# Altium PCB TIDA-00643_PCB.PcbDoc (part 1 of 3)
Units mil, origin at the board's own origin, x right, y up, seen from the top; angles counter-clockwise.
Board outline 1000 x 2200 mil, 2 copper layers (Top Layer, Bottom Layer), stack 62 mil thick; 94 components, 77 nets, 320 pads, 233 vias.
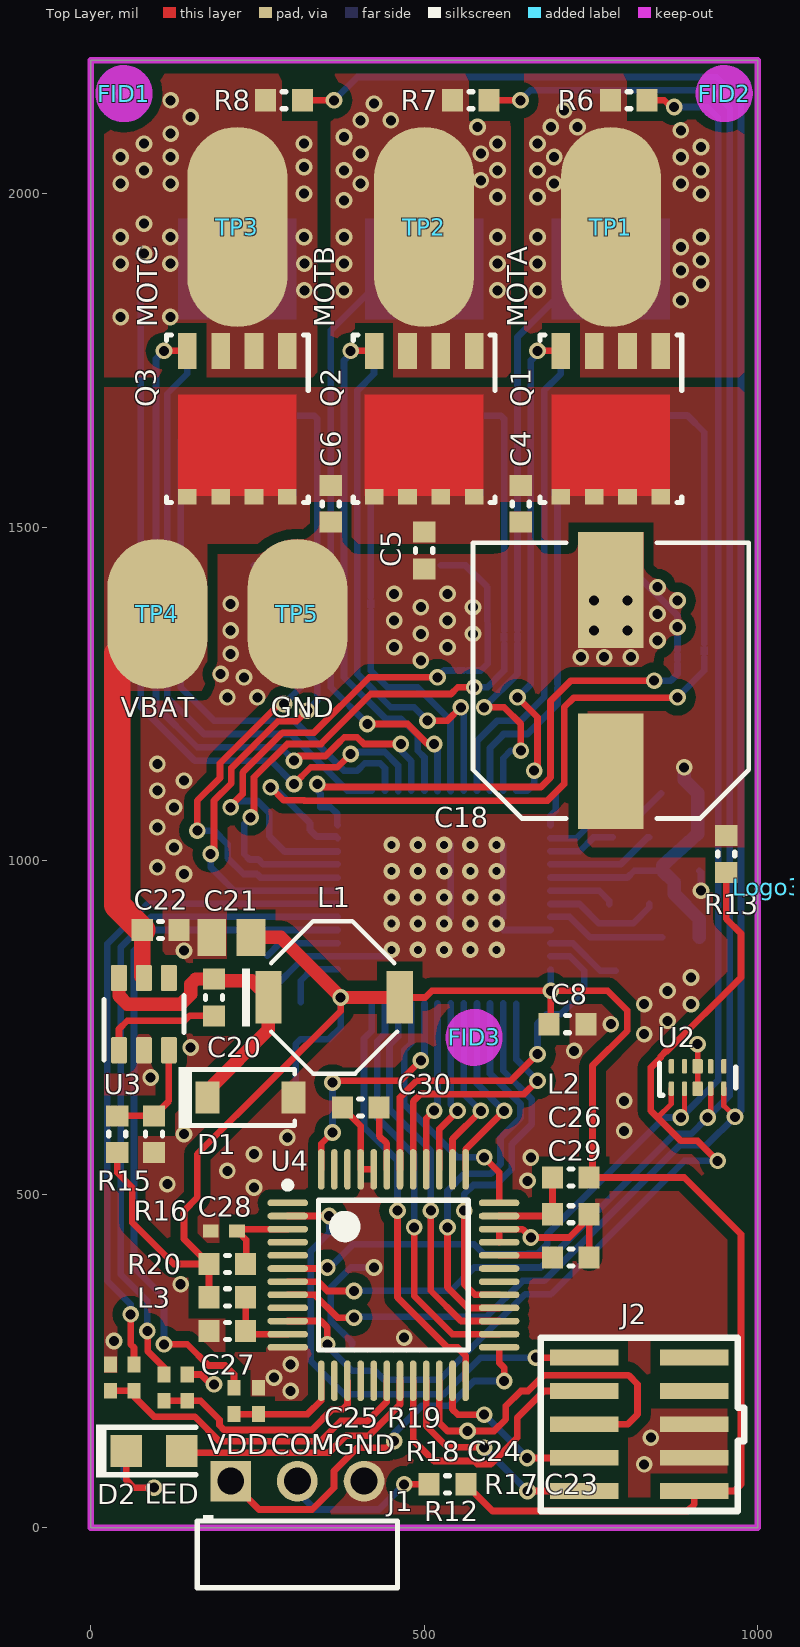
[diagram p0: Top Layer view]
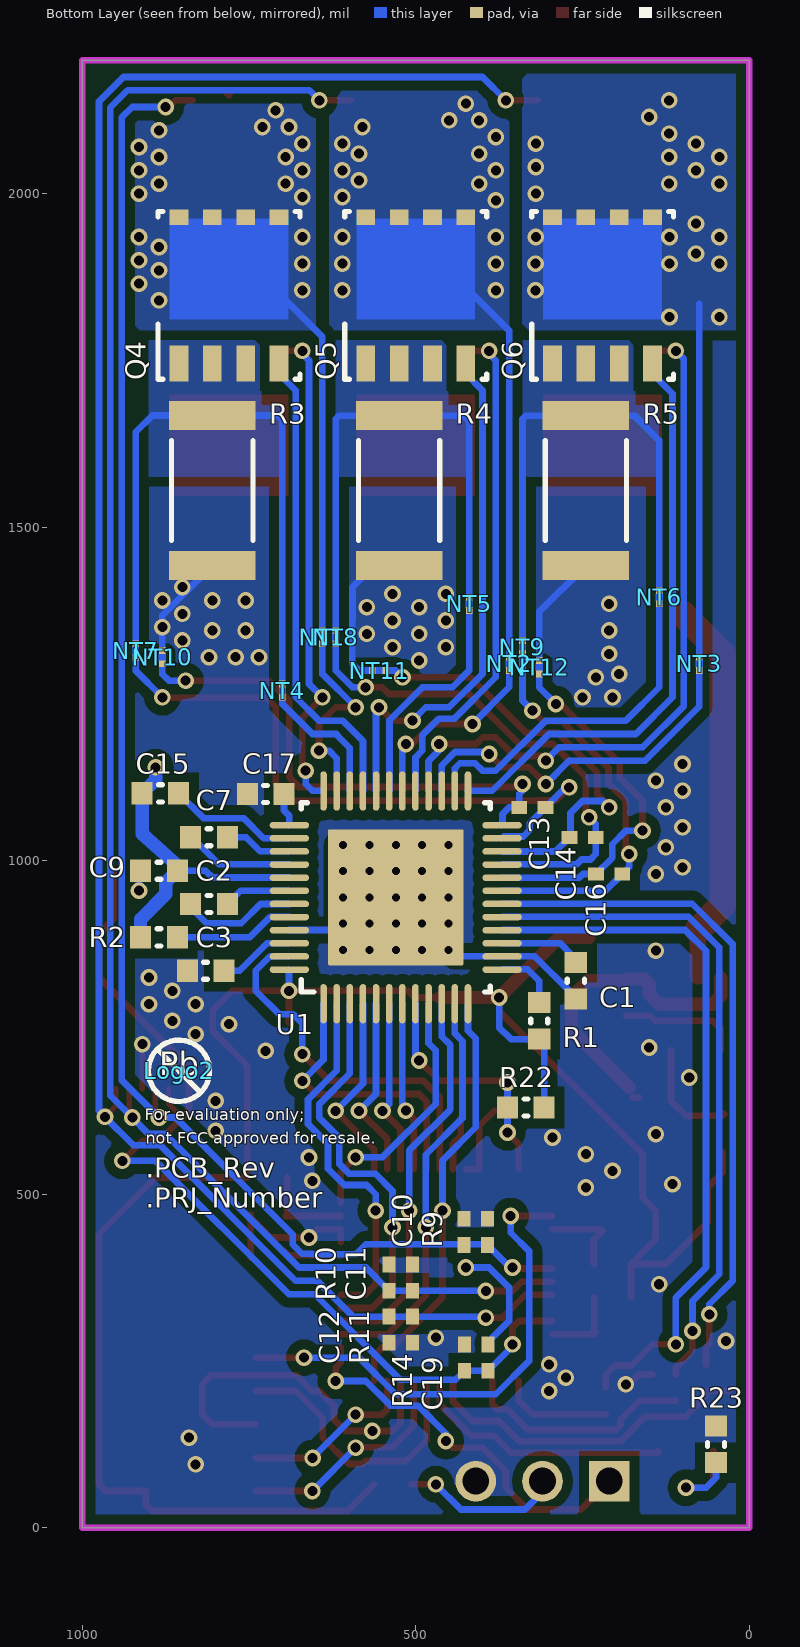
[diagram p1: Bottom Layer view, seen from below]

## Layer stack, top to bottom
Top Solder: solder mask 0.4, Solder Resist, Dk 3.5
Top Layer: signal copper 1.4
Dielectric1: core 59.2, FR-4, Dk 4.8
Bottom Layer: signal copper 1.4
Bottom Solder: solder mask 0.4, Solder Resist, Dk 3.5

## Board outline
0,0 0,2200 1000,2200 1000,0

## Design rules (kind name [scope] priority, off if disabled: settings)
AcuteAngle [All] p1: minimum=4.50000000000000E+0001 checktracksonly=FALSE
AssemblyTestPointUsage [All] p1: valid=2
Clearance Clearance_Keepouts [((IsTrack Or IsArc) And Not InPoly) And IsFree and IsKeepOut vs ((IsTrack Or IsArc) And Not InPoly) And IsFree and IsKeepOut] p1: gap=15 ignorepadtopadclearanceinfootprint=FALSE except(0: Arc-Hole Track-Hole SMDPad-Hole THPad-Hole Via-Hole Fill-Hole Poly-Hole Region-Hole Text-Hole)
Clearance Clearance_BoardEdge_MountingHoles [OnCopper and InComponentClass('Mounting Holes') vs IsKeepOut] p2: gap=40 ignorepadtopadclearanceinfootprint=FALSE except(0: Arc-Hole Track-Hole SMDPad-Hole THPad-Hole Via-Hole Fill-Hole Poly-Hole Region-Hole Text-Hole)
Clearance Clearance_BoardEdge_Poly [OnCopper and InPoly vs IsKeepOut] p3: gap=15 ignorepadtopadclearanceinfootprint=FALSE except(0: Arc-Hole Track-Hole SMDPad-Hole THPad-Hole Via-Hole Fill-Hole Poly-Hole Region-Hole Text-Hole)
Clearance Clearance_BoardEdge [OnCopper and Not InComponentClass('Logo') and not InComponentClass('FiducialMark') and not InRegion(1000,500,4000,800) and Not IsKeepout vs IsKeepOut] p4: gap=15 ignorepadtopadclearanceinfootprint=FALSE except(0: Arc-Hole Track-Hole SMDPad-Hole THPad-Hole Via-Hole Fill-Hole Poly-Hole Region-Hole Text-Hole)
Clearance Clearance_Poly [InPolygon] p5: gap=15 ignorepadtopadclearanceinfootprint=FALSE except(0: Arc-Hole Track-Hole SMDPad-Hole THPad-Hole Via-Hole Fill-Hole Poly-Hole Region-Hole Text-Hole)
Clearance [All] p6: gap=7 ignorepadtopadclearanceinfootprint=FALSE except(0: Arc-Hole Track-Hole SMDPad-Hole THPad-Hole Via-Hole Fill-Hole Poly-Hole Region-Hole Text-Hole)
ComponentClearance ComponentClearance_MountingHoles_FiducialMarks [InComponentClass('Mounting Holes') vs InComponentClass('FiducialMark')] p1: gap=50 collisioncheckmode=3 verticalgap=10 showdistances=FALSE
ComponentClearance ComponentClearance_Shunt [InComponentClass('Header') vs InComponentClass('Shunt')] p2: gap=0 collisioncheckmode=3 verticalgap=0 showdistances=FALSE
ComponentClearance ComponentClearance_Logo [InComponentClass('Logo')] p3: gap=50 collisioncheckmode=3 verticalgap=10 showdistances=FALSE
ComponentClearance ComponentClearance_ScrewToNut [(HasFootprint('NY PMS 440 0025 PH')) vs (HasFootprint('Keystone_1902C'))] p4: gap=5 collisioncheckmode=3 verticalgap=10 showdistances=FALSE
ComponentClearance ComponentClearance_MountingHoles [InComponentClass('Mounting Holes')] p5: gap=250 collisioncheckmode=3 verticalgap=100000 showdistances=FALSE
ComponentClearance ComponentClearance_SmallPassives [HasFootprint('0201*') or HasFootprint('0402*') or HasFootprint('0508') or HasFootprint('0603*') or HasFootprint('0612') or HasFootprint('0805*') or HasFootprint('0815*') or HasFootprint('0830*') or HasFootprint('1206*') or HasFootprint('1210*') or HasFootprint('1808*') or HasFootprint('1812*') or HasFootprint('1825*') or HasFootprint('2010*') or HasFootprint('2220*') or HasFootprint('2225*') or HasFootprint('2512*') or HasFootprint('2728*') or HasFootprint('3518*') vs HasFootprint('0201*') or HasFootprint('0402*') or HasFootprint('0508') or HasFootprint('0603*') or HasFootprint('0612') or HasFootprint('0805*') or HasFootprint('0815*') or HasFootprint('0830*') or HasFootprint('1206*') or HasFootprint('1210*') or HasFootprint('1808*') or HasFootprint('1812*') or HasFootprint('1825*') or HasFootprint('2010*') or HasFootprint('2220*') or HasFootprint('2225*') or HasFootprint('2512*') or HasFootprint('2728*') or HasFootprint('3518*')] p6: gap=10 collisioncheckmode=3 verticalgap=10 showdistances=FALSE
ComponentClearance ComponentClearance_THtoSMT [IsThruComponent vs IsSMTComponent] p7: gap=10 collisioncheckmode=3 verticalgap=30 showdistances=FALSE
ComponentClearance ComponentClearance_THtoTH [IsThruComponent vs IsThruComponent] p8: gap=20 collisioncheckmode=3 verticalgap=30 showdistances=FALSE
ComponentClearance [All] p9: gap=9.99 collisioncheckmode=3 verticalgap=10 showdistances=FALSE
DiffPairsRouting [All] p1: maxlimit=100 minlimit=10 mostfreqgap=10 toplayer_minwidth=15 toplayer_maxwidth=15 toplayer_prefwidth=15 bottomlayer_minwidth=15 bottomlayer_maxwidth=15 bottomlayer_prefwidth=15 maxuncoupledlength=1000
FabricationTestPointUsage TestPointUsage [All] p1: valid=2 allowmultiple=FALSE
FabricationTestpoint Testpoint [All] p1: side=3 testpointundercomponent=TRUE minsize=40 maxsize=100 preferedsize=60 minholesize=0 maxholesize=40 preferedholesize=32 testpointgrid=1 allowsidetop=TRUE allowsidebottom=TRUE usegrid=TRUE gridtolerance=0.01
FanoutControl Fanout_LCC [IsLCC] p1: bgadir=Out bgaviamode=Centered fanoutstyle=Auto fanoutdirection=Alternating viagrid=1 // Fanout_LCC (Default Rule)
FanoutControl Fanout_BGA [IsBGA] p2: bgadir=Out bgaviamode=Centered fanoutstyle=Auto fanoutdirection=Alternating viagrid=1 // Fanout_BGA (Default Rule)
FanoutControl Fanout_Default [All] p4: bgadir=Out bgaviamode=Centered fanoutstyle=Auto fanoutdirection=Alternating viagrid=1 // Fanout_Default (Default Rule)
FanoutControl Fanout_Small [(CompPinCount < 5)] p5: bgadir=Out bgaviamode=Centered fanoutstyle=Auto fanoutdirection=OutThenIn viagrid=1 // Fanout_Small (Default Rule)
HoleSize [All] p1: absolutevalues=TRUE maxlimit=251 minlimit=8 maxpercent=80.000 minpercent=20.000
MinimumAnnularRing MinimumAnnularRing_ThermalPadVias [IsVia and InAnyComponent] p1: minimumring=5.91
MinimumAnnularRing [All] p2: minimumring=5
MinimumSolderMaskSliver MinimumSolderMaskSliver_Logo [InComponentClass('Logo') vs InComponentClass('Logo')] p1: minsoldermaskwidth=0.7
MinimumSolderMaskSliver [All] p2: minsoldermaskwidth=3.94
PlaneClearance [All] p1: clearance=15
PlaneConnect [All] p1: planeconnectstyle=Relief reliefexpansion=10 reliefentries=4 reliefconductorwidth=10 reliefairgap=10
PolygonConnect [All] p1: connectstyle=Direct reliefconductorwidth=10 reliefentries=4 polygonreliefangle="90 Angle" airgapwidth=10
RoutingVias ThermalPadVias [IsVia and InAnyComponent] p1: holewidth=7.87 width=19.68 viastyle="Through Hole" minholewidth=7.87 minwidth=19.68 maxholewidth=12.99 maxwidth=26
RoutingVias [All] p2: holewidth=16 width=34 viastyle="Through Hole" minholewidth=7.87 minwidth=25 maxholewidth=40 maxwidth=65
ShortCircuit [All] p1: allowed=TRUE
SilkToBoardRegionClearance [Not ((IsComment or IsDesignator) And (Hide <> 'False')) and not InRegion(1000,500,4000,800)] p1:
SilkToSilkClearance SilkToSilkClearance_Pb-FreeLogo [(HasFootprint('Pb-Free_Overlay_Medium') OR HasFootprint('Pb-Free_Overlay_Small')) vs (HasFootprint('Pb-Free_Overlay_Medium') OR HasFootprint('Pb-Free_Overlay_Small'))] p1: silktosilkclearance=0
SilkToSilkClearance [All] p2: silktosilkclearance=4
SilkToSolderMaskClearance "Silk to Solder Mask Opening" [All] p1: minsilkscreentomaskgap=2 clearancetoexposedcopper=FALSE
SolderMaskExpansion [All] p1: expansion=1.97
Width [All] p1: maxlimit=100 minlimit=6 preferedwidth=10 checkconnectedcopper=TRUE
13 further rules are at their usual default settings.

## Classes and differential pairs
component class TIDA-00643_8305: C1 C2 C3 C4 C5 C6 C7 C8 C9 C10 C11 C12 C13 C14 C15 C16 C17 FID1 FID2 FID3 Logo2 Logo3 NT1 NT2 NT3 NT4 NT5 NT6 NT7 NT8 NT9 NT10 NT11 NT12 Q1 Q2 Q3 Q4 Q5 Q6 R1 R2 R3 R4 R5 R6 R7 R8 R9 R10 R11 TP1 TP2 TP3 U1 ZZ1 ZZ2 ZZ3
component class TIDA-00643_C2000: C18 C19 C20 C21 C22 C23 C24 C25 C26 C27 C28 C29 C30 D1 D2 J1 J2 L1 L2 L3 R12 R13 R14 R15 R16 R17 R18 R19 R20 R22 R23 TP4 TP5 U2 U3 U4

## Components (designator, comment, footprint, x,y, rotation, side; value= is the part's Value field where it differs from the comment)
C1 "GMK107BJ105KA-T" 0603L 260,820 r90 bottom value=1uF
C2 "GRM188R71E473KA01D" 0603L 810,935 r0 bottom value=0.047uF
C3 "GMK107BJ105KA-T" 0603L 815,835 r180 bottom value=1uF
C4 "GMK107BJ105KA-T" 0603L 645,1535 r270 top value=1uF
C5 "GMK107BJ105KA-T" 0603L 500,1465 r270 top value=1uF
C6 "GMK107BJ105KA-T" 0603L 360,1535 r270 top value=1uF
C7 "GRM188R71E473KA01D" 0603L 810,1035 r180 bottom value=0.047uF
C8 "GRM188R61C105KA93D" 0603L 715,755 r0 top value=1uF
C9 "GRM188R6YA475KE15D" 0603_100L 885,985 r0 bottom value=4.7uF
C10 "885012105016" 0402L 427.59,443.47 r90 bottom value=0.1uF
C11 "885012105016" 0402L 505,375 r90 bottom value=0.1uF
C12 "885012105016" 0402L 540,296.81 r270 bottom value=0.1uF
C13 "GRM1555C1H102JA01D" 0402L 325,1080 r0 bottom value=1000pF
C14 "GRM1555C1H102JA01D" 0402L 250,1035 r0 bottom value=1000pF
C15 "GRM188R6YA225KA12D" 0603L 882.95,1100.89 r180 bottom value=2.2uF
C16 "GRM1555C1H102JA01D" 0402L 210,980 r0 bottom value=1000pF
C17 "GMK107BJ105KA-T" 0603L 725,1100 r180 bottom value=1uF
C18 "EEE-FPV391UAP" CAPAE1030X1080 780,1270 r90 top value=390uF
C19 "885012105016" 0402L 391.79,255 r90 bottom value=0.1uF
C20 "C0603C334Z3VACTU" 0603L 185,795 r270 top value=0.33uF
C21 "C2012X5R1C226K125AC" 0805L 211.17,885 r180 top value=22uF
C22 "GMK107BJ105KA-T" 0603L 105,896.1 r0 top value=1uF
C23 "GRM155R71C222KA01D" 0402L 251.81,190 r90 top value=2200pF
C24 "GRM155R71C222KA01D" 0402L 145,210 r90 top value=2200pF
C25 "GRM155R71C222KA01D" 0402L 30,225 r90 top value=2200pF
C26 "GRM188R61C225KE15D" 0603L 720,470 r0 top value=2.2uF
C27 "GRM188R61C225KE15D" 0603L 205,295 r180 top value=2.2uF
C28 "885012105016" 0402L 200,445 r180 top value=0.1uF
C29 "GRM188R61C225KE15D" 0603L 720,405 r0 top value=2.2uF
C30 "GRM188R61C225KE15D" 0603L 405,630 r180 top value=2.2uF
D1 "MBR1H100SFT3G" SOD-123FL 240,645 r0 top value=100V
D2 "LTST-C171GKT" LED_LTST-C171 95,115 r180 top value=Green
FID1 "Fiducial" Fiducial6.4-20 50,2150 r0 top
FID2 "Fiducial" Fiducial6.4-20 950,2150 r0 top
FID3 "Fiducial" Fiducial6.4-20 575,735 r0 top
J1 "PBC03SGBN" Sullins_xxC03SGBN 310,-40 r0 top
J2 "Header 5X2" "IDC DC3-10P 2X5P" 820,155 r180 top
L1 "SD53-150-R" SD53 365,795 r0 top value=15uH
L2 "BLM18KG601SN1D" 0603L 720,525 r0 top value="600 ohm"
L3 "BLM18KG601SN1D" 0603L 205,345.31 r180 top value="600 ohm"
Logo2 "Pb-Free Symbol" Pb-Free_Overlay_Small 855,685 r180 bottom
Logo3 "FCC disclaimer" FCC_disclaimer_stacked 1015,960 r90 top
NT1 "Net-Tie" Net-Tie_10mil#1 640,1335 r90 bottom net-tie
NT2 "Net-Tie" Net-Tie_10mil#1 360,1295 r90 bottom net-tie
NT3 "Net-Tie" Net-Tie_10mil#1 75,1295 r90 bottom net-tie
NT4 "Net-Tie" Net-Tie_10mil#2 700,1255 r270 bottom net-tie
NT5 "Net-Tie" Net-Tie_10mil#2 420,1385 r270 bottom net-tie
NT6 "Net-Tie" Net-Tie_10mil#2 135,1395 r270 bottom net-tie
NT7 "Net-Tie" Net-Tie_10mil#2 920,1315 r270 bottom net-tie
NT8 "Net-Tie" Net-Tie_10mil#2 620,1335 r270 bottom net-tie
NT9 "Net-Tie" Net-Tie_10mil#2 340,1320 r270 bottom net-tie
NT10 "Net-Tie" Net-Tie_10mil#2 880,1305 r270 bottom net-tie
NT11 "Net-Tie" Net-Tie_10mil#2 555,1285 r180 bottom net-tie
NT12 "Net-Tie" Net-Tie_10mil#2 315,1290 r270 bottom net-tie
Q1 "CSD17573Q5B" TRANS_NexFET_Q5B 780,1655 r270 top value=30V
Q2 "CSD17573Q5B" TRANS_NexFET_Q5B 500,1655 r270 top value=30V
Q3 "CSD17573Q5B" TRANS_NexFET_Q5B 220,1655 r270 top value=30V
Q4 "CSD17573Q5B" TRANS_NexFET_Q5B 780,1855 r90 bottom value=30V
Q5 "CSD17573Q5B" TRANS_NexFET_Q5B 500,1855 r90 bottom value=30V
Q6 "CSD17573Q5B" TRANS_NexFET_Q5B 220,1855 r90 bottom value=30V
R1 "RC0603FR-0710KL" 0603L 315,760 r270 bottom value=10.0k
R2 "RC0603FR-07100RL" 0603L 885,885 r0 bottom value=100
R3 "PMR100HZPFU7L00" 2512L 805,1555 r90 bottom value=0.007
R4 "PMR100HZPFU7L00" 2512L 525,1555 r90 bottom value=0.007
R5 "PMR100HZPFU7L00" 2512L 245,1555 r90 bottom value=0.007
R6 "CRCW060324K9FKEA" 0603L 806.81,2140 r180 top value=24.9k
R7 "CRCW060324K9FKEA" 0603L 570,2140 r180 top value=24.9k
R8 "CRCW060324K9FKEA" 0603L 290,2140 r180 top value=24.9k
R9 "CRCW04024K99FKED" 0402L 392.59,443.47 r270 bottom value=4.99k
R10 "CRCW04024K99FKED" 0402L 540,375 r270 bottom value=4.99k
R11 "CRCW04024K99FKED" 0402L 505,296.81 r90 bottom value=4.99k
R12 "CRCW06030000Z0EA" 0603L 535,65 r0 top value=0
R13 "RC0603FR-0724K9L" 0603L 953,1010 r90 top value=24.9k
R14 "CRCW04024K99FKED" 0402L 426.79,255 r270 bottom value=4.99k
R15 "RC0603FR-0768KL" 0603L 40,590 r270 top value=68.0k
R16 "CRCW060320K0FKEA" 0603L 95,590 r90 top value=20.0k
R17 "CRCW040256R0JNED" 0402L 215,190 r90 top value=56
R18 "CRCW040256R0JNED" 0402L 110,210 r90 top value=56
R19 "CRCW040256R0JNED" 0402L 65,225 r90 top value=56
R20 "CRCW060347K0JNEA" 0603L 205,395.31 r180 top value=47k
R22 "RC0603FR-0710KL" 0603L 335,630 r180 bottom value=10.0k
R23 "CRCW0603330RJNEA" 0603L 50,125 r270 bottom value=330
TP1 "TESTPOINT" TESTPOINT#1 760,1975 r90 top
TP2 "TESTPOINT" TESTPOINT#2 500,1950 r270 top
TP3 "TESTPOINT" TESTPOINT#3 200,1950 r270 top
TP4 "TESTPOINT" TESTPOINT#4 100,1370 r0 top
TP5 "TESTPOINT" TESTPOINT#4 310,1370 r0 top
U1 "DRV8305NPHPR" PHP0048G_L 530,945 r90 bottom
U2 "TPD4E05U06QDQA" DQA0010A 910,675 r90 top
U3 "LMR16006XDDCR" DDC0006A_N 80,770 r90 top
U4 "TMS320F28027FPT" PT0048A_L 454,378.72 r0 top
ZZ1 "This Assembly Note will show in the PcbDoc and associated outputs" AssemblyNote 1073,2856 r90 top
ZZ2 "This Assembly Note will show in the PcbDoc and associated outputs" AssemblyNote 898,2856 r90 top
ZZ3 "This Assembly Note will show in the PcbDoc and associated outputs" AssemblyNote 635,3020 r90 top

## Footprints (in the part's own frame and the unit in brackets; to place one, negate y for a bottom-side part, rotate by r counter-clockwise, add the part's x,y. Pads: shape width x height; smd on the part's side, far side on the other; paste and mask are expansions set on the pad)
0402L [mm] "0402 from SM-752 data"
  rect 0.6x0.5 smd: 1(-0.5,0) 2(0.5,0)
  body extent -0.55,-0.3 0.55,0.3, height 0.6
0603_100L [mm] "0603 from SM-752 data"
  rect 0.8x0.85 smd: 1(-0.7,0) 2(0.7,0)
  silkscreen extent -0.07,-0.33 0.07,0.33, body extent -0.87,-0.47 0.87,0.47, height 1
0603L [mm] "0603 from SM-752 data"
  rect 0.8x0.85 smd: 1(-0.7,0) 2(0.7,0)
  silkscreen extent -0.07,-0.33 0.07,0.33, body extent -0.87,-0.47 0.87,0.47, height 0.85
0805L [mm] "0805 from SM-752 data"
  rect 1.1x1.4 smd: 1(-0.75,0) 2(0.75,0)
  body extent -1.1,-0.72 1.1,0.72, height 1.45
2512L [mm] "Chip Resistor, Body 6.3x3.2mm, IPC High Density"
  rect 1.1x3.3 smd: 1(-2.85,0) 2(2.85,0)
  silkscreen extent -1.9,-1.55 1.9,1.55, body extent -3.22,-1.67 3.22,1.67, height 0.71
AssemblyNote [mil] "Assembly Note"
CAPAE1030X1080 [mm] "10.3 x 10.3 mm base"
  rect 4.4x2.5 smd: 1(-3.45,0) 2(3.45,0)
  silkscreen extent -5.25,-5.25 5.25,5.25, body extent -5.25,-5.25 5.25,5.25, height 10.5
DDC0006A_N [mm]
  rrect17% 1x0.6 smd: 1(-1.375,0.95) 2(-1.375,0) 3(-1.375,-0.95) 4(1.375,-0.95) 5(1.375,0) 6(1.375,0.95)
  silkscreen extent -1.75,-1.52 0.7,1.53, body extent -1.43,-1.48 1.43,1.49, height 0.92
DQA0010A [mm] "SON, 10-Leads, Body 1x2.5mm, Pitch 0.5mm, TI Recommended"
  rrect50% 0.55x0.2 smd: 1(-0.425,1) 2(-0.425,0.5) 4(-0.425,-0.5) 5(-0.425,-1) 6(0.425,-1) 7(0.425,-0.5) 9(0.425,0.5) 10(0.425,1)
  rrect25% 0.55x0.4 smd: 3(-0.425,0) 8(0.425,0)
  silkscreen extent -0.67,-1.45 0.55,1.45, body extent -0.55,-1.3 0.55,1.3, height 0.56
FCC_disclaimer_stacked [mil]
Fiducial6.4-20 [mil]
  round 25 smd mask+26.87: 1(0,0)
  Top Layer keep-out circle w46.37: c0,0 r19.68
"IDC DC3-10P 2X5P" [mm]
  rect 2.6x0.6 smd: 1(-2.159,2.54) 2(2.032,2.54) 3(-2.159,1.27) 4(2.032,1.27) 5(-2.159,0) 6(2.032,0) 7(-2.159,-1.27) 8(2.032,-1.27) 9(-2.159,-2.54) 10(2.032,-2.54)
  silkscreen extent -4.06,-3.3 3.68,3.3
LED_LTST-C171 [mm] "LITE-ON"
  rect 1.2x1.2 smd: 1(-1.05,0) 2(1.05,0)
  silkscreen extent -1.6,-1 2.2,1, body extent -1.05,-0.67 1.05,0.67, height 0.8
Net-Tie_10mil#1 [mil] "10mil net tie, no solder mask opening, no solder paste"
  rect 10x10 smd paste-5 mask-5: 1(-10,0) 2(10,0)
  Top Layer region: -6,5 6,5 6,-5 -6,-5
Net-Tie_10mil#2 [mil] "10mil net tie, no solder mask opening, no solder paste"
  rect 10x10 smd paste-5 mask-5: 1(10,0) 2(-10,0)
  Top Layer region: 6,5 -6,5 -6,-5 6,-5
Pb-Free_Overlay_Small [mil]
  silkscreen extent -46,-46 46,46
PHP0048G_L [mm] "TSQFP, 48-Leads, Body 7x7mm, Pitch 0.5mm, IPC High Density"
  rrect100% 1.5x0.25 smd: 1(-4.05,2.75) 2(-4.05,2.25) 3(-4.05,1.75) 4(-4.05,1.25) 5(-4.05,0.75) 6(-4.05,0.25) 7(-4.05,-0.25) 8(-4.05,-0.75) 9(-4.05,-1.25) 10(-4.05,-1.75) 11(-4.05,-2.25) 12(-4.05,-2.75) 25(4.05,-2.75) 26(4.05,-2.25) 27(4.05,-1.75) 28(4.05,-1.25) 29(4.05,-0.75) 30(4.05,-0.25) 31(4.05,0.25) 32(4.05,0.75) 33(4.05,1.25) 34(4.05,1.75) 35(4.05,2.25) 36(4.05,2.75)
  rrect100% 0.25x1.5 smd: 13(-2.75,-4.05) 14(-2.25,-4.05) 15(-1.75,-4.05) 16(-1.25,-4.05) 17(-0.75,-4.05) 18(-0.25,-4.05) 19(0.25,-4.05) 20(0.75,-4.05) 21(1.25,-4.05) 22(1.75,-4.05) 23(2.25,-4.05) 24(2.75,-4.05) 37(2.75,4.05) 38(2.25,4.05) 39(1.75,4.05) 40(1.25,4.05) 41(0.75,4.05) 42(0.25,4.05) 43(-0.25,4.05) 44(-0.75,4.05) 45(-1.25,4.05) 46(-1.75,4.05) 47(-2.25,4.05) 48(-2.75,4.05)
  rrect2% 5.17x5.17 smd: 49(0,0)
  silkscreen extent -3.6,-3.6 3.6,3.6, body extent -3.5,-3.5 3.5,3.5, height 1.2
PT0048A_L [mm] "Thin QFP, 48-Leads, Body 7x7mm, Pitch 0.5mm, IPC High Density"
  oval 1.55x0.25 smd: 1(-4.025,2.75) 2(-4.025,2.25) 3(-4.025,1.75) 4(-4.025,1.25) 5(-4.025,0.75) 6(-4.025,0.25) 7(-4.025,-0.25) 8(-4.025,-0.75) 9(-4.025,-1.25) 10(-4.025,-1.75) 11(-4.025,-2.25) 12(-4.025,-2.75) 25(4.025,-2.75) 26(4.025,-2.25) 27(4.025,-1.75) 28(4.025,-1.25) 29(4.025,-0.75) 30(4.025,-0.25) 31(4.025,0.25) 32(4.025,0.75) 33(4.025,1.25) 34(4.025,1.75) 35(4.025,2.25) 36(4.025,2.75)
  oval 0.25x1.55 smd: 13(-2.75,-4.025) 14(-2.25,-4.025) 15(-1.75,-4.025) 16(-1.25,-4.025) 17(-0.75,-4.025) 18(-0.25,-4.025) 19(0.25,-4.025) 20(0.75,-4.025) 21(1.25,-4.025) 22(1.75,-4.025) 23(2.25,-4.025) 24(2.75,-4.025) 37(2.75,4.025) 38(2.25,4.025) 39(1.75,4.025) 40(1.25,4.025) 41(0.75,4.025) 42(0.25,4.025) 43(-0.25,4.025) 44(-0.75,4.025) 45(-1.25,4.025) 46(-1.75,4.025) 47(-2.25,4.025) 48(-2.75,4.025)
  silkscreen extent -4.15,-2.85 2.85,3.55, body extent -3.5,-3.5 3.5,3.5, height 1.61
SD53 [mm] "COOPER BUSSMAN"
  rect 1x2 smd: 1(-2.5,0) 2(2.5,0)
  silkscreen extent -3.5,-2.9 2.4,2.9, body extent -2.86,-2.86 2.86,2.86, height 3.01
SOD-123FL [mm] "Copied from SOD-123"
  rect 0.915x1.22 smd: 1(-1.637,0) 2(1.637,0)
  silkscreen extent -2.74,-1.16 1.68,1.16, body extent -1.9,-0.9 1.9,0.9, height 1
Sullins_xxC03SGBN [mm] "Header, 2.54 mm, 3x1, R/A, TH"
  rect 1.55x1.55 hole 1.02: 1(-2.54,2.79)
  round 1.55 hole 1.02: 2(0,2.79) 3(2.54,2.79)
  silkscreen extent -3.81,-1.27 3.81,1.5, body extent -3.81,-9.35 3.81,3.11, height 3.69
TESTPOINT#1 [mil]
  oval 300x150 smd: 1(-25,-20)
TESTPOINT#2 [mil]
  oval 300x150 smd: 1(0,0)
TESTPOINT#3 [mil]
  oval 300x150 smd: 1(0,20)
TESTPOINT#4 [mil]
  oval 150x225 smd: 1(0,0)
TRANS_NexFET_Q5B [mm] "TI recommended land pattern (nominal) November 2012"
  rect 1.372x0.71 smd paste-0.4: 1(-2.776,1.905) 2(-2.776,0.635) 3(-2.776,-0.635) 4(-2.776,-1.905)
  rect 0.59x0.71 smd paste-0.3: 5(2.776,-1.905) 6(2.776,-0.635) 7(2.776,0.635) 8(2.776,1.905)
  Top Layer region: -1.106,-2.261 2.744,-2.261 2.744,2.259 -1.106,2.259
  silkscreen extent -3.38,-2.7 3,2.7, body extent -3.23,-2.55 2.87,2.55, height 1.06

## Part data
C1 C3 C4 C5 C6 C17 C22: "CAP, CERM, 1 μF, 35 V, +/- 10%, X5R, 0603", Cap_Case=0603, Manufacturer="Taiyo Yuden", Supplier Part Number 1=587-1437-1-ND, TempCo=X5R, Tolerance_%=10, Value1=Unknown, Value2=35V, ValueDisplayed=1μF, Cap_F=0.000001, ComponentLink1Description="Datasheet link", ComponentLink1URL=http://www.yuden.co.jp/or/product/category/capacitor/GMK107BJ105KA-T.pdf, CompType=Capacitor, MountType=SMT, PackageReference=0603, PartNumber=GMK107BJ105KA-T, Polarized=N, Published=2008-06-19, Publisher="Texas Instruments", RoHS=Y, Supplier 1=Digi-Key, Supplier 2=Mouser, Supplier 3=Newark, Supplier Part Number 2=963-GMK107BJ105KA-T, Supplier Part Number 3=93K5526, SymbolVersion=2008-07-09, TaMax_C=85, TaMin_C=-55, Technology=Ceramic, U/M=EA, VDC_V=35
  C1 C3 C17 C22: LatestRevisionDate=2015-07-15
  C4 C5 C6: LatestRevisionDate=2015-07-17
C2 C7: "CAP, CERM, 0.047 μF, 25 V, +/- 10%, X7R, 0603", Cap_Case=0603, Manufacturer=MuRata, Supplier Part Number 1=490-1522-1-ND, TempCo=X7R, Tolerance_%=10, Value1=Unknown, Value2=25V, ValueDisplayed=0.047μF, Cap_F=0.000000047, ComponentLink1Description="Datasheet link", ComponentLink1URL=http://search.murata.co.jp/Ceramy/PnsearchViewAction.do?HnOFG=ON&HnNFG=ON&SEL_CNT=50&sLang=en&sKey=GRM188R71E473KA01D&x=9&y=9&search=startwith, CompType=Capacitor, LatestRevisionDate=2015-07-15, MountType=SMT, PackageReference=0603, PartNumber=GRM188R71E473KA01D, Polarized=N, Published=2008-06-19, Publisher="Texas Instruments", RoHS=Y, Supplier 1=Digi-Key, Supplier 2=Mouser, Supplier 3=Farnell, Supplier Part Number 2=81-GRM39X473K25D, Supplier Part Number 3=8820007, SymbolVersion=2008-07-09, TaMax_C=125, TaMin_C=-55, Technology=Ceramic, U/M=EA, VDC_V=25
C8: "CAP, CERM, 1 μF, 16 V, +/- 10%, X5R, 0603", Cap_Case=0603, Manufacturer=MuRata, Supplier Part Number 1=490-1536-1-ND, TempCo=X5R, Tolerance_%=10, Value1=Unknown, Value2=16V, ValueDisplayed=1μF, Cap_F=0.000001, ComponentLink1Description="Datasheet link", ComponentLink1URL=http://search.murata.co.jp/Ceramy/PnsearchViewAction.do?HnOFG=ON&HnNFG=ON&SEL_CNT=50&sLang=en&sKey=GRM188R61C105KA93D&x=9&y=9&search=startwith, CompType=Capacitor, LatestRevisionDate=2015-07-15, MountType=SMT, PackageReference=0603, PartNumber=GRM188R61C105KA93D, Polarized=N, Published=2008-06-19, Publisher="Texas Instruments", RoHS=Y, Supplier 1=Digi-Key, Supplier 2=Mouser, Supplier 3=Farnell, Supplier Part Number 2=81-GRM39R105K16, Supplier Part Number 3=1828801, SymbolVersion=2008-07-09, TaMax_C=85, TaMin_C=-55, Technology=Ceramic, U/M=EA, VDC_V=16
C9: "CAP, CERM, 4.7 μF, 35 V, +/- 10%, X5R, 0603", Cap_Case=0603, Manufacturer=MuRata, Supplier Part Number 1=490-7205-1-ND, TempCo=X5R, Tolerance_%=10, Value1=Unknown, Value2=35V, ValueDisplayed=4.7μF, Cap_F=0.0000047, ComponentLink1Description="Datasheet link", ComponentLink1URL=http://psearch.murata.com/capacitor/product/GRM188R6YA475KE15%23.pdf, CompType=Capacitor, LatestRevisionDate=2015-07-15, MountType=SMT, PackageReference=0603, PartNumber=GRM188R6YA475KE15D, Polarized=N, Published=2008-06-19, Publisher="Texas Instruments", RoHS=Y, Supplier 1=Digi-Key, Supplier 2=Mouser, Supplier 3=Farnell, Supplier Part Number 2=81-GRM188R6YA475KE5D, Supplier Part Number 3=2426960, SymbolVersion=2008-07-09, TaMax_C=85, TaMin_C=-55, Technology=Ceramic, U/M=EA, VDC_V=35
C10 C11 C12 C19 C28: "CAP, CERM, 0.1 μF, 16 V, +/- 20%, X5R, 0402", Cap_Case=0402, Manufacturer="Wurth Elektronik", Supplier Part Number 1=710-885012105016, TempCo=X5R, Tolerance_%=20, Value1=Unknown, Value2=16V, ValueDisplayed=0.1μF, Cap_F=0.0000001, ComponentLink1Description="Datasheet link", ComponentLink1URL=http://katalog.we-online.de/pbs/datasheet/885012105016.pdf, CompType=Capacitor, LatestRevisionDate=2015-07-15, MountType=SMT, PackageReference=0402, PartNumber=885012105016, Polarized=N, Published=2008-06-19, Publisher="Texas Instruments", RoHS=Y, Supplier 1=Mouser, Supplier 2=Newark, Supplier Part Number 2=40Y4445, SymbolVersion=2008-07-09, TaMax_C=85, TaMin_C=-55, Technology=Ceramic, U/M=EA, VDC_V=16
C13 C14 C16: "CAP, CERM, 1000 pF, 50 V, +/- 5%, C0G/NP0, 0402", Cap_Case=0402, Manufacturer=MuRata, Supplier Part Number 1=490-3244-1-ND, TempCo=C0G/NP0, Tolerance_%=5, Value1=Unknown, Value2=50V, ValueDisplayed=1000pF, Cap_F=0.000000001, ComponentLink1Description="Datasheet link", ComponentLink1URL=http://search.murata.co.jp/Ceramy/PnsearchViewAction.do?HnOFG=ON&HnNFG=ON&SEL_CNT=50&sLang=en&sKey=GRM1555C1H102JA01D&x=9&y=9&search=startwith, CompType=Capacitor, LatestRevisionDate=2015-07-15, MountType=SMT, PackageReference=0402, PartNumber=GRM1555C1H102JA01D, Polarized=N, Published=2008-06-19, Publisher="Texas Instruments", RoHS=Y, Supplier 1=Digi-Key, Supplier 2=Mouser, Supplier 3=Farnell, Supplier Part Number 2=81-GRM1555C1H102JA1D, Supplier Part Number 3=8819556, SymbolVersion=2008-07-09, TaMax_C=125, TaMin_C=-55, Technology=Ceramic, U/M=EA, VDC_V=50
C15: "CAP, CERM, 2.2 μF, 35 V, +/- 10%, X5R, 0603", Cap_Case=0603, Manufacturer=MuRata, Supplier Part Number 1=490-7204-6-ND, TempCo=X5R, Tolerance_%=10, Value1=Unknown, Value2=35V, ValueDisplayed=2.2μF, Cap_F=0.0000022, ComponentLink1Description="Datasheet link", ComponentLink1URL=http://search.murata.co.jp/Ceramy/image/img/A01X/G101/ENG/GRM188R6YA225KA12-01.pdf, CompType=Capacitor, LatestRevisionDate=2015-07-15, MountType=SMT, PackageReference=0603, PartNumber=GRM188R6YA225KA12D, Polarized=N, Published=2008-06-19, Publisher="Texas Instruments", RoHS=Y, Supplier 1=Digi-Key, SymbolVersion=2008-07-09, TaMax_C=85, TaMin_C=-55, Technology=Ceramic, U/M=EA, VDC_V=35
C18: "CAP, AL, 390 μF, 35 V, +/- 20%, 0.08 ohm, SMD", Cap_Case=10x10.2mm, Manufacturer=Panasonic, Supplier Part Number 1=PCE4446CT-ND, Tolerance_%=20, Value1="0.08 ohm", Value2=35V, ValueDisplayed=390μF, Cap_F=0.00039, ComponentLink1Description="Datasheet link", ComponentLink1URL=http://industrial.panasonic.com/lecs/www-data/pdf/ABA0000/ABA0000CE114.pdf, CompType=Capacitor, ESR_ohm=0.08, IRMS_A=0.85, LatestRevisionDate=2015-07-10, MountType=SMT, PackageReference="10 x 10", PartNumber=EEE-FPV391UAP, Polarized=Y, Publisher="Texas Instruments", RoHS=Y, Series=FP, Supplier 1=Digi-Key, Supplier 2=Mouser, Supplier Part Number 2=667-EEE-FPV391UAP, SymbolVersion=2008-07-09, TaMax_C=105, TaMin_C=-55, Technology=AL, U/M=EA, VDC_V=35
C20: "CAP, CERM, 0.33 μF, 25 V, +80/-20%, Y5V, 0603", Cap_Case=0603, Manufacturer=Kemet, Supplier Part Number 1=399-1292-1-ND, TempCo=Y5V, Tolerance_%=80, Value1=Unknown, Value2=25V, ValueDisplayed=0.33μF, Cap_F=0.00000033, ComponentLink1Description="Datasheet link", ComponentLink1URL=http://www.kemet.com/kemet/web/homepage/kechome.nsf/vapubfiles/F3102_Y5V.pdf/$file/F3102_Y5V.pdf, CompType=Capacitor, LatestRevisionDate=2015-07-15, MountType=SMT, PackageReference=0603, PartNumber=C0603C334Z3VACTU, Polarized=N, Published=2008-06-19, Publisher="Texas Instruments", RoHS=Y, Supplier 1=Digi-Key, Supplier 2=Mouser, Supplier 3=Farnell, Supplier Part Number 2=80-C0603C334Z3V, Supplier Part Number 3=1163537, SymbolVersion=2008-07-09, TaMax_C=85, TaMin_C=-30, Technology=Ceramic, U/M=EA, VDC_V=25
C21: "CAP, CERM, 22 μF, 16 V, +/- 10%, X5R, 0805", Cap_Case=0805, Manufacturer=TDK, Supplier Part Number 1=445-6797-1-ND, TempCo=X5R, Tolerance_%=10, Value1=Unknown, Value2=16V, ValueDisplayed=22μF, Cap_F=0.000022, ComponentLink1Description="Datasheet link", ComponentLink1URL=http://product.tdk.com/capacitor/mlcc/en/documents/C2012X5R1C226K125AC.pdf, CompType=Capacitor, LatestRevisionDate=2015-07-15, MountType=SMT, PackageReference=0805, PartNumber=C2012X5R1C226K125AC, Polarized=N, Published=2008-06-19, Publisher="Texas Instruments", RoHS=Y, Supplier 1=Digi-Key, Supplier 2=Mouser, Supplier 3=Farnell, Supplier Part Number 2=810-C2012X5R1C226K, Supplier Part Number 3=2346925, SymbolVersion=2008-07-09, TaMax_C=85, TaMin_C=-55, Technology=Ceramic, U/M=EA, VDC_V=16
C23 C24 C25: "CAP, CERM, 2200 pF, 16 V, +/- 10%, X7R, 0402", Cap_Case=0402, Manufacturer=MuRata, Supplier Part Number 1=GRM155R71C222KA01D-ND, TempCo=X7R, Tolerance_%=10, Value1=Unknown, Value2=16V, ValueDisplayed=2200pF, Cap_F=0.0000000022, ComponentLink1Description="Datasheet link", ComponentLink1URL=http://search.murata.co.jp/Ceramy/PnsearchViewAction.do?HnOFG=ON&HnNFG=ON&SEL_CNT=50&sLang=en&sKey=GRM155R71C222KA01D&x=9&y=9&search=startwith, CompType=Capacitor, LatestRevisionDate=2015-07-15, MountType=SMT, PackageReference=0402, PartNumber=GRM155R71C222KA01D, Polarized=N, Published=2008-06-19, Publisher="Texas Instruments", RoHS=Y, Supplier 1=Digi-Key, Supplier 2=Mouser, Supplier Part Number 2=81-GRM155R71C222KA1D, SymbolVersion=2008-07-09, TaMax_C=125, TaMin_C=-55, Technology=Ceramic, U/M=EA, VDC_V=16
C26 C27 C29 C30: "CAP, CERM, 2.2 μF, 16 V, +/- 10%, X5R, 0603", Cap_Case=0603, Manufacturer=MuRata, Supplier Part Number 1=490-3296-1-ND, TempCo=X5R, Tolerance_%=10, Value1=Unknown, Value2=16V, ValueDisplayed=2.2μF, Cap_F=0.0000022, ComponentLink1Description="Datasheet link", ComponentLink1URL=http://psearch.murata.com/capacitor/product/GRM188R61C225KE15%23.pdf, CompType=Capacitor, LatestRevisionDate=2015-07-15, MountType=SMT, PackageReference=0603, PartNumber=GRM188R61C225KE15D, Polarized=N, Published=2008-06-19, Publisher="Texas Instruments", RoHS=Y, Supplier 1=Digi-Key, Supplier 2=Mouser, Supplier 3=Farnell, Supplier Part Number 2=81-GRM188R61C225KE15, Supplier Part Number 3=1735526, SymbolVersion=2008-07-09, TaMax_C=85, TaMin_C=-55, Technology=Ceramic, U/M=EA, VDC_V=16
D1: "Diode, Schottky, 100 V, 1 A, SOD-123FL", Manufacturer="ON Semiconductor", Supplier Part Number 1=MBR1H100SFT3GOSCT-ND, Value1=1A, Value2=0.76V, ComponentLink1Description="Datasheet link", ComponentLink1URL=http://www.onsemi.com/pub_link/Collateral/MBR1H100SF-D.PDF, CompType=Diode, Io_A=1, LatestRevisionDate=2015-07-16, MountType=SMT, PackageReference=SOD-123FL, PartNumber=MBR1H100SFT3G, Published=2008-06-26, Publisher="Texas Instruments", RJC_CperW=85, RoHS=Y, Supplier 1=Digi-Key, Supplier 2=Mouser, Supplier Part Number 2=863-MBR1H100SFT3G, SymbolVersion=2008-12-08, TJmax_C=175, Type=Schottky, U/M=EA, Vf_V=0.76, Vr_V=100
D2: "LED, Green, SMD", Color=green, Manufacturer=Lite-On, Supplier Part Number 1=160-1423-1-ND, Value1=W, Value2=2.1V, ComponentLink1Description="Datasheet link", ComponentLink1URL=https://sps06.itg.ti.com/sites/KMS/crossdivteams/altium/docs/ComponentDatasheets/LTST-C171GKT.pdf, CompType=LED, Io_A=20, LatestRevisionDate=2015-07-13, MountType=SMT, PackageReference=LED_0805, PartNumber=LTST-C171GKT, Published=2008-07-11, Publisher="Texas Instruments", RoHS=Y, Supplier 1=Digi-Key, Supplier 2=Mouser, Supplier Part Number 2=859-LTST-C171GKT, SymbolVersion=2008-12-08, Type=AlInGaP, U/M=EA, Vf_V=2.1
FID1 FID2 FID3: "Fiducial mark.  There is nothing to buy or mount.", Manufacturer=N/A, ClassName=FiducialMark, CompType=Fiducial, LatestRevisionDate=2015-06-01, LatestRevisionNote="Added Alternate PartNumber and Alternate Manufacturer parameters to appropriate components.", MountType=N/A, PackageReference=N/A, PartNumber=N/A, Publisher="Texas Instruments", SymbolCreator=codlsc, SymbolVersion=2009-11-4
J1: "Header, 2.54 mm, 3x1, Gold, R/A, TH", Manufacturer="Sullins Connector Solutions", Supplier Part Number 1=S1321E-03-ND, ClassName=Header, ComponentLink1Description="Datasheet Link", ComponentLink1URL=http://www.sullinscorp.com/catalogs/77_PAGE108-109_.100_MALE_HDR.pdf, CompType=Header, LatestRevisionDate=2015-07-16, MountType=TH, PackageReference="Header, 2.54 mm, 3x1, R/A, TH", PartNumber=PBC03SGBN, Publisher="Texas Instruments", RoHS=Y, Supplier 1=Digi-Key, SymbolCreator=a0799628, SymbolVersion=2013-03-28, U/M=EA
J2: "Header, 5-Pin, Dual row", LatestRevisionDate=17-Jul-2002, LatestRevisionNote="Re-released for DXP Platform.", Publisher="Altium Limited"
L1: "Inductor, Shielded Drum Core, Ferrite, 15 μH, 1.1 A, 0.122 ohm, SMD", Manufacturer="Cooper Bussman", Supplier Part Number 1=513-1458-1-ND, Value1="0.122 ohm", Value2=1.1A, ValueDisplayed=15μH, ComponentLink1Description="Datasheet link", ComponentLink1URL=http://www.cooperindustries.com/content/dam/public/bussmann/Electronics/Resources/Data%20Sheets/Bus_Elx_DS_PM%204149_SD53_Series.pdf, CompType=Inductor, DCR_ohm=0.122, Imax_A=1.1, Ind_H=15.0E-6, Irms="1.1A @ 40C rise", Isat="1.1A @ 30% inductance drop", LatestRevisionDate=2015-06-30, Material=Ferrite, MountType=SMT, PackageReference=5.72x3x5.2mm, PartNumber=SD53-150-R, Published=2008-06-26, Publisher="Texas Instruments", RoHS=Y, Supplier 1=Digi-Key, Supplier 2=Mouser, Supplier 3=Newark, Supplier Part Number 2=704-SD53-150-R, Supplier Part Number 3=99M5528, SymbolCreator=a0412235, SymbolVersion=2013-02-25, Technology="Shielded Drum Core"
L2 L3: "Ferrite Bead, 600 ohm @ 100 MHz, 1.3 A, 0603", Manufacturer=MuRata, Supplier Part Number 1=490-5258-1-ND, Value1="0.15 ohm", Value2=1.3A, ComponentLink1Description="Datasheet link", ComponentLink1URL=http://search.murata.co.jp/Ceramy/image/img/PDF/ENG/L0110S0100BLM18K.pdf, CompType="Ferrite Bead", DCR_ohm=0.15, Imax_A=1.3, LatestRevisionDate=2015-06-30, MountType=SMT, PackageReference=0603, PartNumber=BLM18KG601SN1D, Published=2014-04-30, Publisher="Texas Instruments", RoHS=Y, Supplier 1=Digi-Key, Supplier 2=Mouser, Supplier 3=Farnell, Supplier Part Number 2=81-BLM18KG601SN1D, Supplier Part Number 3=1781094, SymbolVersion=2009-06-02, ZTyp@100MHz_Ohm=600
Logo2: library part Pb-Free, LatestRevisionDate=2014-11-20, Published=2009-03-03, Publisher="Texas Instruments", SymbolCreator=a0412235, SymbolVersion=2011-08-22
Logo3: library part FCC_disclaimer, "FCC_disclaimer", LatestRevisionDate=2014-11-20, Published=2009-03-03, Publisher="Texas Instruments", SymbolCreator=codlsc, SymbolVersion=2011-08-22
NT1 NT2 NT3 NT4 NT5 NT6 NT7 NT8 NT9 NT10 NT11 NT12: "Single point connection between nets.", LatestRevisionDate=2015-06-01, LatestRevisionNote="Added Alternate PartNumber and Alternate Manufacturer parameters to appropriate components.", MountType=SMT, PackageReference=N/A, Publisher="Texas Instruments", SymbolCreator=codlsc, SymbolVersion=2009-07-01
Q1 Q2 Q3 Q4 Q5 Q6: "MOSFET, N-CH, 30 V, 100 A, SON 5x6mm", Alternate Manufacturer=None, Manufacturer="Texas Instruments", Supplier Part Number 1=CSD17573Q5B-ND, Value1="0.00145 ohm", Value2="49 nC", ChType=N, ComponentLink1Description="Datasheet link", ComponentLink1URL=http://www.ti.com/lit/ds/symlink/csd17573q5b.pdf, CompType=MOSFET, IdsMax_A=100, LatestRevisionDate=2015-07-16, LatestRevisionNote="Added parts.", MountType=SMT, PackageReference="SON 5x6mm", PartNumber=CSD17573Q5B, Published=2008-06-19, Publisher="Texas Instruments", QgTyp_nC=49, Rdson45_ohm=0.00145, RoHS=Y, Supplier 1=Digi-Key, Supplier 2=Mouser, Supplier Part Number 2=595-CSD17573Q5B, SymbolVersion=2008-07-09, U/M=EA, VdsMax_V=30, Vgs_V=20
R1 R22: "RES, 10.0 k, 1%, 0.1 W, 0603", Manufacturer="Yageo America", Power_W=0.1, Supplier Part Number 1=311-10.0KHRCT-ND, TempCo="200 ppm/C", Tolerance_%=1, Value1=1%, Value2=0.1W, Value_Code=10k0, ValueDisplayed=10.0k, ComponentLink1Description="Datasheet link", ComponentLink1URL=http://www.yageo.com/pdf/Pu-RC0603_51_PbFree_L_2.pdf, CompType=Resistor, EIA_Code=E96, LatestRevisionDate=2015-06-13, MountType=SMT, PackageReference=0603, PartNumber=RC0603FR-0710KL, Published=2008-06-26, Publisher="Texas Instruments", Res_ohm=10000, RoHS=Y, Supplier 1=Digi-Key, Supplier 2=Mouser, Supplier 3=Farnell, Supplier Part Number 2=603-RC0603FR-0710KL, Supplier Part Number 3=9238603, SymbolVersion=2009-05-29, Technology="Thick Film", U/M=EA, VDC_V=150
R2: "RES, 100, 1%, 0.1 W, 0603", Manufacturer="Yageo America", Power_W=0.1, Supplier Part Number 1=311-100HRCT-ND, TempCo="200 ppm/C", Tolerance_%=1, Value1=1%, Value2=0.1W, Value_Code=100R, ValueDisplayed=100, ComponentLink1Description="Datasheet link", ComponentLink1URL=http://www.yageo.com/pdf/Pu-RC0603_51_PbFree_L_2.pdf, CompType=Resistor, EIA_Code=E96, LatestRevisionDate=2015-06-13, MountType=SMT, PackageReference=0603, PartNumber=RC0603FR-07100RL, Published=2008-06-26, Publisher="Texas Instruments", Res_ohm=100, RoHS=Y, Supplier 1=Digi-Key, Supplier 2=Mouser, Supplier 3=Farnell, Supplier Part Number 2=603-RC0603FR-07100RL, Supplier Part Number 3=9238360, SymbolVersion=2009-05-29, Technology="Thick Film", U/M=EA, VDC_V=150
R3 R4 R5: "RES, 0.007, 1%, 2 W, 2512", Manufacturer=Rohm, Power_W=2, Supplier Part Number 1=RHM.007AUCT-ND, TempCo="100 ppm/C", Tolerance_%=1, Value1=1%, Value2=2W, Value_Code=7L000, ValueDisplayed=0.007, ComponentLink1Description="Datasheet link", ComponentLink1URL=http://media.digikey.com/pdf/Data%20Sheets/Rohm%20PDFs/PMR100-SERIES.pdf, CompType=Resistor, EIA_Code=E96, LatestRevisionDate=2015-04-21, MountType=SMT, PackageReference=2512, PartNumber=PMR100HZPFU7L00, Published=2008-06-26, Publisher="Texas Instruments", Res_ohm=0.007, RoHS=Y, Supplier 1=Digi-Key, SymbolVersion=2009-05-29, Technology="Thick Film", U/M=EA
R6 R7 R8: "RES, 24.9 k, 1%, 0.1 W, 0603", Manufacturer=Vishay-Dale, Power_W=0.1, Supplier Part Number 1=541-24.9KHCT-ND, TempCo="100 ppm/C", Tolerance_%=1, Value1=1%, Value2=0.1W, Value_Code=24k9, ValueDisplayed=24.9k, ComponentLink1Description="Datasheet link", ComponentLink1URL=http://www.vishay.com/docs/20035/dcrcwe3.pdf, CompType=Resistor, EIA_Code=E96, LatestRevisionDate=2015-06-13, MountType=SMT, PackageReference=0603, PartNumber=CRCW060324K9FKEA, Published=2008-06-26, Publisher="Texas Instruments", Res_ohm=24900, RoHS=Y, Supplier 1=Digi-Key, Supplier 2=Mouser, Supplier 3=Farnell, Supplier Part Number 2=71-CRCW0603-24.9K-E3, Supplier Part Number 3=1469785, SymbolVersion=2009-05-29, Technology="Thick Film", U/M=EA, VDC_V=75
R9 R10 R11 R14: "RES, 4.99 k, 1%, 0.063 W, 0402", Manufacturer=Vishay-Dale, Power_W=0.063, Supplier Part Number 1=541-4.99KLCT-ND, TempCo="100 ppm/C", Tolerance_%=1, Value1=1%, Value2=0.063W, Value_Code=4k99, ValueDisplayed=4.99k, ComponentLink1Description="Datasheet link", ComponentLink1URL=http://www.vishay.com/docs/20035/dcrcwe3.pdf, CompType=Resistor, EIA_Code=E96, LatestRevisionDate=2015-07-01, MountType=SMT, PackageReference=0402, PartNumber=CRCW04024K99FKED, Published=2008-06-26, Publisher="Texas Instruments", Res_ohm=4990, RoHS=Y, Supplier 1=Digi-Key, Supplier 2=Mouser, Supplier 3=Farnell, Supplier Part Number 2=71-CRCW0402-4.99K-E3, Supplier Part Number 3=1469715, SymbolVersion=2009-05-29, Technology="Thick Film", U/M=EA, VDC_V=50
R12: "RES, 0, 5%, 0.1 W, 0603", Manufacturer=Vishay-Dale, Power_W=0.1, Supplier Part Number 1=541-0.0GCT-ND, TempCo="200 ppm/C", Tolerance_%=5, Value1=5%, Value2=0.1W, Value_Code=0000, ValueDisplayed=0, ComponentLink1Description="Datasheet link", ComponentLink1URL=http://www.vishay.com/docs/20035/dcrcwe3.pdf, CompType=Resistor, EIA_Code=E24, LatestRevisionDate=2015-06-13, MountType=SMT, PackageReference=0603, PartNumber=CRCW06030000Z0EA, Published=2008-06-26, Publisher="Texas Instruments", Res_ohm=0, RoHS=Y, Supplier 1=Digi-Key, Supplier 2=Mouser, Supplier 3=Farnell, Supplier Part Number 2=71-CRCW0603-0-E3, Supplier Part Number 3=1469739, SymbolVersion=2009-05-29, Technology="Thick Film", U/M=EA, VDC_V=75
R13: "RES, 24.9 k, 1%, 0.1 W, 0603", Manufacturer="Yageo America", Power_W=0.1, Supplier Part Number 1=311-24.9KHRCT-ND, TempCo="200 ppm/C", Tolerance_%=1, Value1=1%, Value2=0.1W, Value_Code=24k9, ValueDisplayed=24.9k, ComponentLink1Description="Datasheet link", ComponentLink1URL=http://www.yageo.com/pdf/Pu-RC0603_51_PbFree_L_2.pdf, CompType=Resistor, EIA_Code=E96, LatestRevisionDate=2015-06-13, MountType=SMT, PackageReference=0603, PartNumber=RC0603FR-0724K9L, Published=2008-06-26, Publisher="Texas Instruments", Res_ohm=24900, RoHS=Y, Supplier 1=Digi-Key, Supplier 2=Mouser, Supplier 3=Farnell, Supplier Part Number 2=603-RC0603FR-0724K9L, Supplier Part Number 3=1799336, SymbolVersion=2009-05-29, Technology="Thick Film", U/M=EA, VDC_V=150
R15: "RES, 68.0 k, 1%, 0.1 W, 0603", Manufacturer="Yageo America", Power_W=0.1, Supplier Part Number 1=311-68.0KHRCT-ND, TempCo="200 ppm/C", Tolerance_%=1, Value1=1%, Value2=0.1W, Value_Code=68k0, ValueDisplayed=68.0k, ComponentLink1Description="Datasheet link", ComponentLink1URL=http://www.yageo.com/pdf/Pu-RC0603_51_PbFree_L_2.pdf, CompType=Resistor, LatestRevisionDate=2015-06-13, MountType=SMT, PackageReference=0603, PartNumber=RC0603FR-0768KL, Published=2008-06-26, Publisher="Texas Instruments", Res_ohm=68000, RoHS=Y, Supplier 1=Digi-Key, Supplier 2=Mouser, Supplier 3=Farnell, Supplier Part Number 2=603-RC0603FR-0768KL, Supplier Part Number 3=9238700, SymbolVersion=2009-05-29, Technology="Thick Film", U/M=EA, VDC_V=150
R16: "RES, 20.0 k, 1%, 0.1 W, 0603", Manufacturer=Vishay-Dale, Power_W=0.1, Supplier Part Number 1=541-20.0KHCT-ND, TempCo="100 ppm/C", Tolerance_%=1, Value1=1%, Value2=0.1W, Value_Code=20k0, ValueDisplayed=20.0k, ComponentLink1Description="Datasheet link", ComponentLink1URL=http://www.vishay.com/docs/20035/dcrcwe3.pdf, CompType=Resistor, EIA_Code=E96, LatestRevisionDate=2015-06-13, MountType=SMT, PackageReference=0603, PartNumber=CRCW060320K0FKEA, Published=2008-06-26, Publisher="Texas Instruments", Res_ohm=20000, RoHS=Y, Supplier 1=Digi-Key, Supplier 2=Mouser, Supplier 3=Farnell, Supplier Part Number 2=71-CRCW0603-20K-E3, Supplier Part Number 3=1469774, SymbolVersion=2009-05-29, Technology="Thick Film", U/M=EA, VDC_V=75
R17 R18 R19: "RES, 56, 5%, 0.063 W, 0402", Manufacturer=Vishay-Dale, Power_W=0.063, Supplier Part Number 1=541-56JCT-ND, TempCo="200 ppm/C", Tolerance_%=5, Value1=5%, Value2=0.063W, Value_Code=56R0, ValueDisplayed=56, ComponentLink1Description="Datasheet link", ComponentLink1URL=http://www.vishay.com/docs/20035/dcrcwe3.pdf, CompType=Resistor, EIA_Code=E24, LatestRevisionDate=2015-07-01, MountType=SMT, PackageReference=0402, PartNumber=CRCW040256R0JNED, Published=2008-06-26, Publisher="Texas Instruments", Res_ohm=56, RoHS=Y, Supplier 1=Digi-Key, Supplier 2=Mouser, Supplier 3=Farnell, Supplier Part Number 2=71-CRCW0402J-56-E3, Supplier Part Number 3=1570684, SymbolVersion=2009-05-29, Technology="Thick Film", U/M=EA, VDC_V=50
R20: "RES, 47 k, 5%, 0.1 W, 0603", Manufacturer=Vishay-Dale, Power_W=0.1, Supplier Part Number 1=541-47KGCT-ND, TempCo="200 ppm/C", Tolerance_%=5, Value1=5%, Value2=0.1W, Value_Code=47k0, ValueDisplayed=47k, ComponentLink1Description="Datasheet link", ComponentLink1URL=http://www.vishay.com/docs/20035/dcrcwe3.pdf, CompType=Resistor, EIA_Code=E24, LatestRevisionDate=2015-06-13, MountType=SMT, PackageReference=0603, PartNumber=CRCW060347K0JNEA, Published=2008-06-26, Publisher="Texas Instruments", Res_ohm=47000, RoHS=Y, Supplier 1=Digi-Key, Supplier 2=Mouser, Supplier 3=Farnell, Supplier Part Number 2=71-CRCW060347K0JNEA, Supplier Part Number 3=1652881, SymbolVersion=2009-05-29, Technology="Thick Film", U/M=EA, VDC_V=75
R23: "RES, 330, 5%, 0.1 W, 0603", Manufacturer=Vishay-Dale, Power_W=0.1, Supplier Part Number 1=541-330GCT-ND, TempCo="200 ppm/C", Tolerance_%=5, Value1=5%, Value2=0.1W, Value_Code=330R, ValueDisplayed=330, ComponentLink1Description="Datasheet link", ComponentLink1URL=http://www.vishay.com/docs/20035/dcrcwe3.pdf, CompType=Resistor, EIA_Code=E24, LatestRevisionDate=2015-06-13, MountType=SMT, PackageReference=0603, PartNumber=CRCW0603330RJNEA, Published=2008-06-26, Publisher="Texas Instruments", Res_ohm=330, RoHS=Y, Supplier 1=Digi-Key, Supplier 2=Mouser, Supplier 3=Farnell, Supplier Part Number 2=71-CRCW0603J-330-E3, Supplier Part Number 3=1692522, SymbolVersion=2009-05-29, Technology="Thick Film", U/M=EA, VDC_V=75
TP1 TP2 TP3 TP4 TP5: "TEST POINT.  No entry in BOM.", CompType=Testpoint, LatestRevisionDate=2015-06-01, LatestRevisionNote="Added Alternate PartNumber and Alternate Manufacturer parameters to appropriate components.", PackageReference=N/A, Publisher="Texas Instruments", SymbolVersion=2010-10-20
U1: library part DRV83053EPHPRQ1, "Three Phase Automotive Gate Driver with Three Integrated Current Shunt Amplifiers and Voltage Regulator, PHP0048G", Alternate Manufacturer="Texas Instruments", Alternate PartNumber=DRV8305NPHP, ComponentLink1Description="Datasheet Link", ComponentLink1URL=https://sps06.itg.ti.com/sites/KMS/crossdivteams/altium/docs/ComponentDatasheets/TI_Q100_3PhPredriver_DRV8305_v9.pdf, CompType=IC, LatestRevisionDate=2015-07-15, Manufacturer="Texas Instruments", MountType=SMT, PackageReference=PHP0048G, PartNumber=DRV8305NPHPR, Publisher="Texas Instruments", SymbolCreator=Altium, SymbolVersion=2015-02-03, U/M=EA
U2: "4 Channel Protection Solution for Super-Speed (up to 6 GBPS) Interface, DQA0010A", Alternate Manufacturer="Texas Instruments", ComponentLink1Description="Datasheet Link", ComponentLink1URL=https://sps06.itg.ti.com/sites/KMS/crossdivteams/altium/docs/ComponentDatasheets/tpd4e05u06.pdf, CompType=IC, LatestRevisionDate=2015-07-06, Manufacturer="Texas Instruments", MountType=SMT, PackageReference=DQA0010A, PartNumber=TPD4E05U06QDQA, Publisher="Texas Instruments", RoHS=Y, SymbolCreator=a0411947, SymbolVersion=2013-08-01, U/M=EA
U3: "Wide Input Voltage Range Buck Regulator with High Efficiency Sleep Mode, DDC0006A", Alternate Manufacturer="Texas Instruments", Alternate PartNumber=LMR16006XDDCT, ComponentLink1Description="Datasheet Link", ComponentLink1URL=http://www.ti.com/lit/ds/symlink/lmr16006.pdf, CompType=IC, LatestRevisionDate=2015-07-09, Manufacturer="Texas Instruments", MountType=SMT, PackageReference=DDC0006A, PartNumber=LMR16006XDDCR, Publisher="Texas Instruments", RoHS=Y, SymbolCreator=x0208326, SymbolVersion=2013-12-17, U/M=EA
U4: library part TMS320F28027FPTQ, "Piccolo Microcontroller, PT0048A", Alternate Manufacturer="Texas Instruments", Alternate PartNumber=TMS320F28027FPTT, ComponentLink1Description="Datasheet Link", ComponentLink1URL=http://www.ti.com/lit/ds/symlink/tms320f28027f.pdf, CompType=IC, LatestRevisionDate=2015-06-29, Manufacturer="Texas Instruments", MountType=SMT, PackageReference=PT0048A, PartNumber=TMS320F28027FPT, Publisher="Texas Instruments", RoHS=Y, SymbolCreator=Altium, SymbolVersion=2015-06-16, U/M=EA
ZZ1 ZZ2 ZZ3: library part AssemblyNote, ClassName=AssemblyNote, CompType=AssemblyNote, LatestRevisionDate=2015-07-14, Publisher="Texas Instruments", SymbolCreator=codlsc, SymbolVersion=2010-05-18

## Via types
v1: diameter 25, hole 15, Top Layer to Bottom Layer, tented both sides, 208 vias
v2: diameter 25, hole 12, Top Layer to Bottom Layer, tented top, 25 vias

## Nets (pads, with @x,y where several pads share a name; then routed paths per layer and width w, separated by ;. In a path a pad name is that pad's centre, name@x,y a point inside that pad or via, vN(x,y) a via of type N, cw(c..) or ccw(c..) an arc to the next point about the centre after c; other vN are vias at no path point)
3.3V: C8.1 C21.1 J2.1 L1.2 L2.2 L3.2 R1.2 R12.2 R15.2 R20.2 R22.2 U1.48 | length 3092.7
  Top Layer w10: R15.2@40,562.44 40,532.44 62.44,510 62.44,457.56 124.69,395.31 R20.2@177.44,395.31 ; L3.2@177.44,345.31 R20.2@177.44,395.31 ; v1(375,795) 375,774.53 274.46,673.99 273.99,673.99 160,560 160,495 140,475 140,432.76 R20.2@177.44,395.31 ; L1.2@463.43,795 501.73,795 511.73,805 v1(690,805) ; R12.2@562.56,65 602.56,25 895,25 905,35 J2.1@905,55 965,55 975,65 975,440 890,525 L2.2@752.56,525 ; C8.1@687.44,755 690,757.56 v1(690,805) ; L2.2@752.56,530.32 752.56,692.91 804.5,744.85 804.5,775.5 775,805 v1(690,805)
  Top Layer w20: C21.1@240.69,885 285,885 v1(375,795) L1.2@463.43,795
  Bottom Layer w10: R22.2@307.44,630 307.44,724.88 R1.2@315,732.44 357.44,732.44 375,750 v1(375,795) ; U1.48@689.45,836.73 690,836.18 v1(690,805)
COM: J1.1 U4.25 | length 582.2
  Top Layer w10: J1.1@210,69.84 252.51,27.33 332.33,27.33 365,60 365,84.96 400.04,120 445,120 v1(455,130) ; U4.25@612.46,270.46 612.46,247.46 620,239.93 v1(620,220)
  Bottom Layer w10: v1(455,130) 455,141.16 496.84,183 538,183 575,220 v1(620,220)
EN_GATE: U1.1 U4.41 | length 430
  Top Layer w10: U4.41@483.53,537.19 483.53,638.84 495,650.31 514.84,650.31 515.16,650 650,650 v1(670,670)
  Bottom Layer w10: U1.1@638.27,785.55 638.27,701.73 v1(670,670)
GH_A: Q1.4 U1.36 | length 742.2
  Top Layer w10: v1(640,1245) 670,1215 670,1140 v1(665,1135) ; v1(670,1764.3) Q1.4@705,1764.3
  Bottom Layer w10: U1.36@638.27,1104.76 654.76,1104.76 665,1115 v1(665,1135) ; v1(640,1245) 660,1265 660,1750 670,1760 v1(670,1764.3)
GH_B: Q2.4 U1.29 | length 762.6
  Top Layer w10: v1(390,1764.3) Q2.4@425,1764.3
  Bottom Layer w10: v1(390,1764.3) 390,1760 380,1750 380,1275 442,1213 465,1213 490.5,1187.5 490.5,1164.85 500.47,1154.88 500.47,1104.76 U1.29@500.83,1105.12
GH_C: Q3.4 U1.28 | length 1068.7
  Top Layer w10: v1(110,1764.3) Q3.4@145,1764.3 ; v1(305,1150) 312,1157 352,1157 370,1175 370.35,1175 380.35,1185 399.65,1185 409.65,1175 v1(465,1175)
  Bottom Layer w10: v1(110,1764.3) 98,1752.3 98,1232 160,1170 285,1170 v1(305,1150) ; v1(465,1175) 465,1165 480.79,1149.21 U1.28@480.79,1104.76
GL_A: Q4.4 U1.33 | length 713.5
  Bottom Layer w10: U1.33@579.21,1104.76 579.21,1179.21 610,1210 645,1210 680,1245 680,1705 705,1730 Q4.4@705,1745.7
GL_B: Q5.4 U1.32 | length 795.4
  Top Layer w10: v1(505,1210) 535,1210 v1(555,1230)
  Bottom Layer w10: Q5.4@425,1745.7 425,1730 400,1705 400,1280 450,1230 485,1230 v1(505,1210) ; v1(555,1230) 559.53,1225.47 U1.32@559.53,1104.76
GL_C: Q6.4 U1.25 | length 877.9
  Bottom Layer w10: Q6.4@145,1745.7 145,1730 115,1700 115,1245 170,1190 300,1190 385.24,1104.76 U1.25@421.73,1104.76
GND: C1.1 C3.1 C4.2 C5.2 C6.2 C8.2 C9.2 C10.2 C11.2 C12.2 C17.1 C18.2 C19.2 C21.2 C22.2 C23.2 C24.2 C25.2 C26.2 C27.2 C28.2 C29.2 C30.2 D1.2 J1.3 J2.3 J2.5 NT10.2 NT11.2 NT12.2 R3.1 R4.1 R5.1 R9.1 R10.1 R11.1 R14.1 R16.1 R23.1 TP5.1 U1.14 U1.45 U1.49 U2.3 U2.8 U3.2 U4.12 U4.33 U4.34 U4.44 U4.45 | length 1754.8
  Top Layer w8: U2.3@910,658.27 U2.8@910,691.73 v1(910,725)
  Top Layer w10: C24.2@145,229.69 165.31,229.69 180,215 v1(185,215) ; C30.2@382.44,625 404.79,602.65 U4.45@404.79,537.19 U4.44@424.47,537.19 ; U4.33@612.46,427.94 U4.34@612.46,447.62 647.38,447.62 v1(660,435) 717.56,435 C26.2@747.56,465 ; C29.2@747.56,405 C26.2@747.56,465 ; C26.2@747.56,470 C26.2@747.56,465